# Altium PCB AD_605_PCB1.PcbDoc
Units mm, origin at the board's own origin, x right, y up, seen from the top; angles counter-clockwise.
Board outline 74 x 38 mm, 2 copper layers (Top Layer, Bottom Layer); 17 components, 13 nets, 47 pads, 0 vias.
Unrouted connection lines stored in the file: 12.
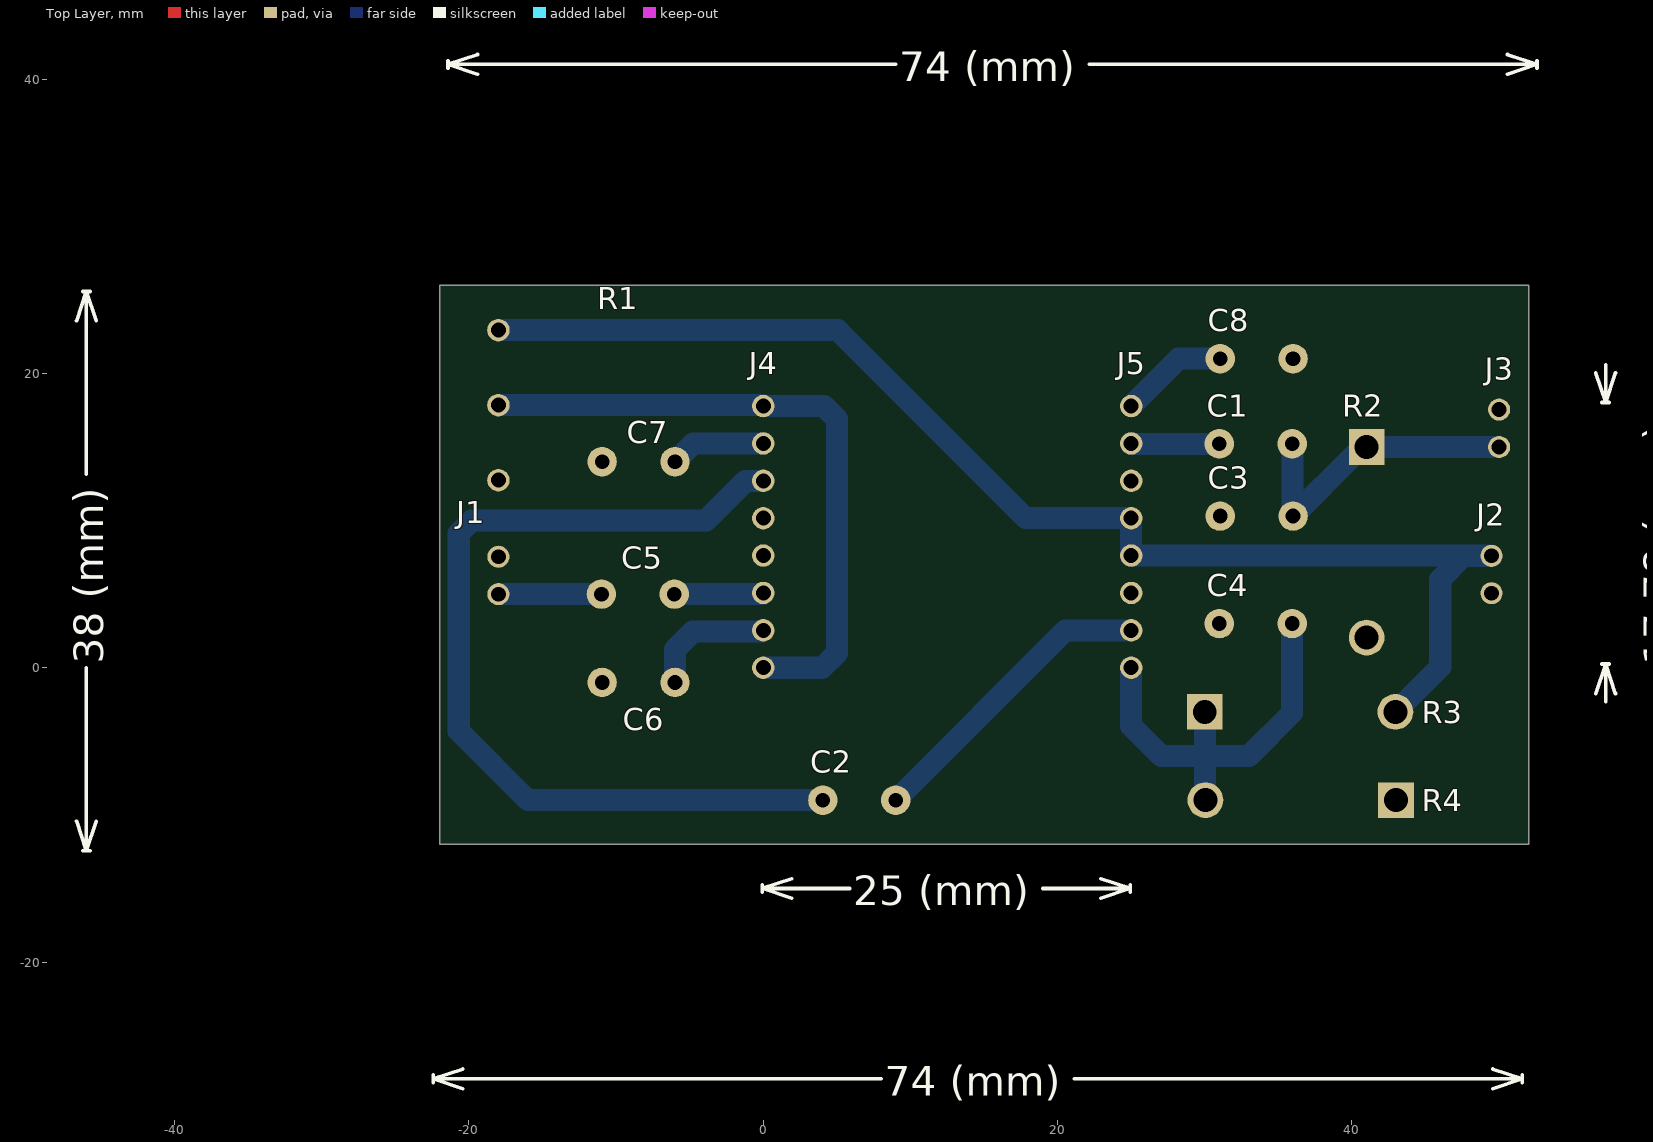
[diagram p0: Top Layer view]
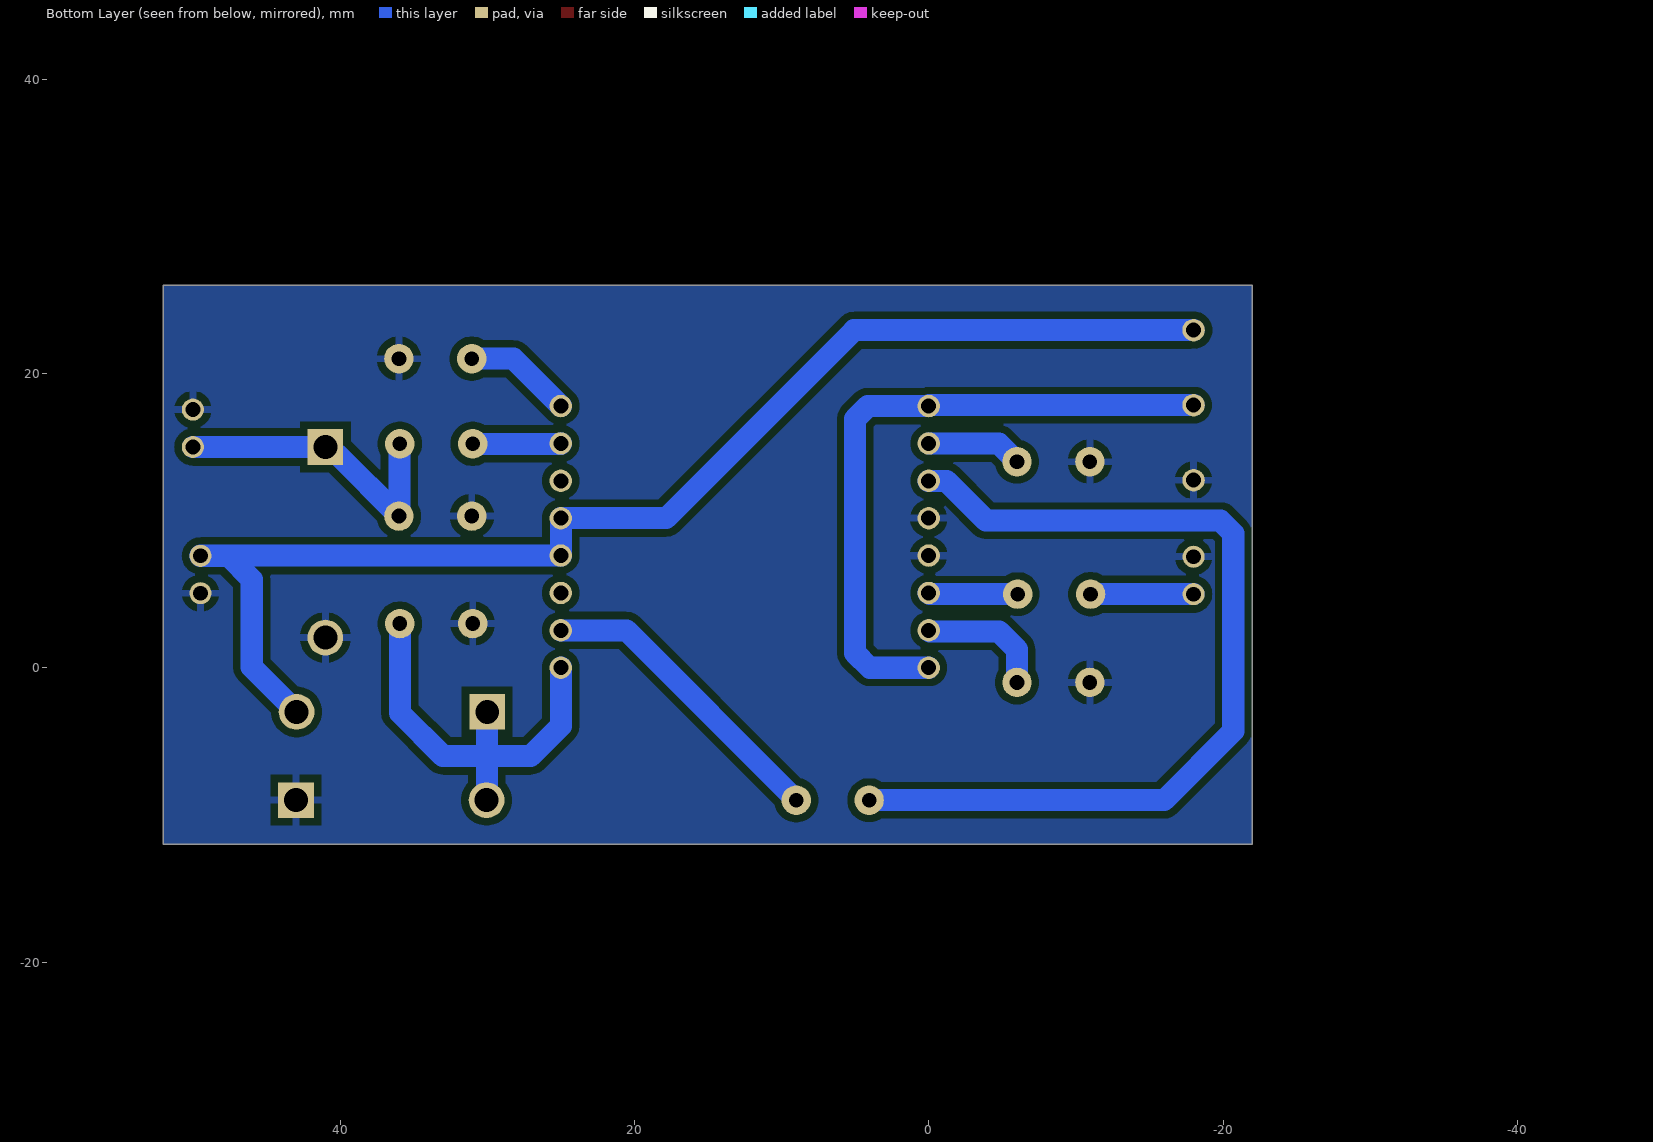
[diagram p1: Bottom Layer view, seen from below]
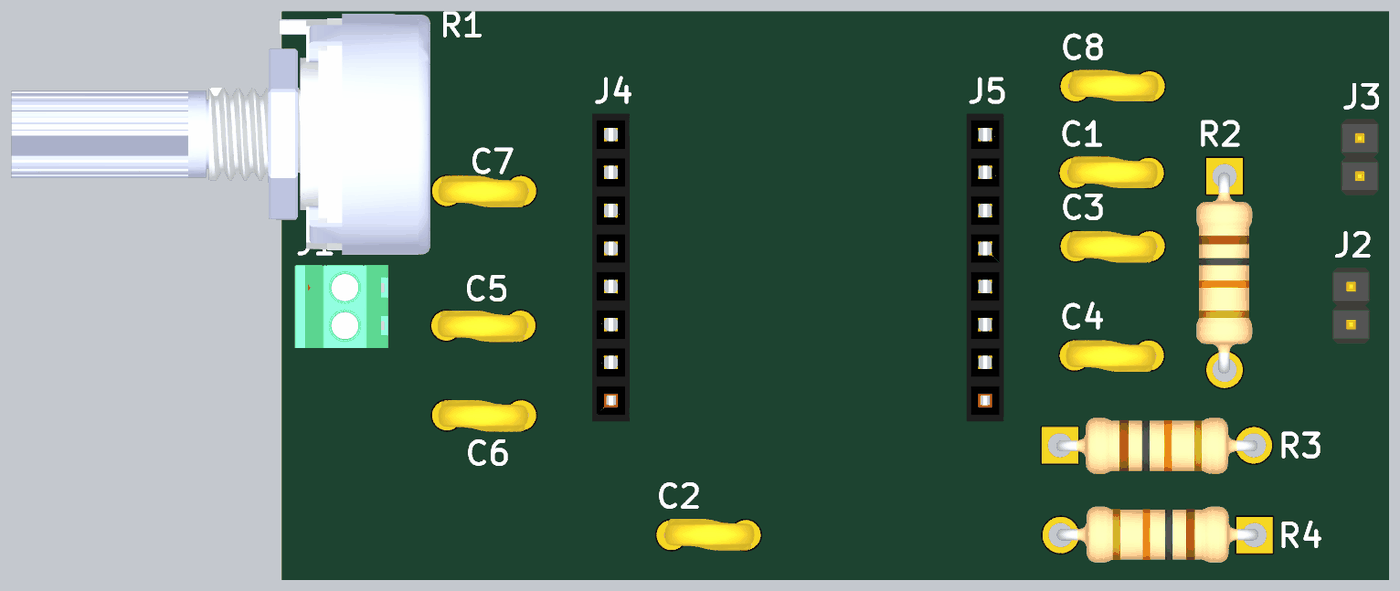
[diagram p2: 3D render of the assembled board from above, using the file's embedded part models]

## Layer stack, top to bottom
Top Solder: solder mask 0.0102, Solder Resist, Dk 3.5
Top Layer: signal copper 0.0356
Dielectric 1: dielectric 0.32, FR-4, Dk 4.8
Bottom Layer: signal copper 0.0356
Bottom Solder: solder mask 0.0102, Solder Resist, Dk 3.5

## Board outline
-22,-12 52,-12 52,26 -22,26

## Design rules (kind name [scope] priority, off if disabled: settings)
Clearance [All] p1: gap=0.5 ignorepadtopadclearanceinfootprint=FALSE
PolygonConnect [All] p1: connectstyle=Relief reliefconductorwidth=0.5 reliefentries=4 polygonreliefangle="90 Angle" airgapwidth=0.5
RoutingVias [All] p1: holewidth=0.711 width=1.27 viastyle="Through Hole" minholewidth=0.711 minwidth=1.27 maxholewidth=0.711 maxwidth=1.27
SolderMaskExpansion [All] p1: expansion=0.102 istentingtop=FALSE
Width [All] p1: maxlimit=3 minlimit=1 preferedwidth=1.5 minimp=50.000000 maximp=50.000000 favimp=50.000000
30 further rules are at their usual default settings.

## Components (designator, comment, footprint, x,y, rotation, side; value= is the part's Value field where it differs from the comment)
C1 "0.1uF" CAP 36.066,15.215 r180 top
C2 "0.1uF" CAP 9.127,-9 r180 top
C3 "0.01uF" CAP 30.92,10.306 r0 top
C4 "0.1uF" CAP 30.859,3 r0 top
C5 "0.1uF" CAP -11.127,5 r0 top
C6 "0.1uF" CAP -11.08,-1 r0 top
C7 "0.1uF" CAP -11.08,14 r0 top
C8 "0.1uF" CAP 36.127,21 r180 top
J1 "Terminal" Terminal -18,7.54 r270 top
J2 "Header 1x2" "Header 1x2" 49.484,5.064 r90 top
J3 "Header 1x2" "Header 1x2" 50,17.54 r270 top
J4 "Header 1x8" "Header 1x8" 0,0 r90 top
J5 "Header 1x8" "Header 1x8" 25,0 r90 top
R1 "Potansiyemetre" Potansiyemetre -18,22.938 r270 top
R2 "100K" "THT Res" 41,2.046 r90 top
R3 "100K" "THT Res" 42.954,-3 r180 top
R4 "100K" "THT Res" 30.046,-9 r0 top

## Footprints (in the part's own frame and the unit in brackets; to place one, negate y for a bottom-side part, rotate by r counter-clockwise, add the part's x,y. Pads: shape width x height; smd on the part's side, far side on the other; paste and mask are expansions set on the pad)
CAP [mm]
  round 2 hole 1: 1(5.08,0) 2(0.127,0)
  body extent -0.46,-1.08 5.54,1.02, height 2.02
"Header 1x2" [mm]
  round 1.5 hole 1: 1(0,0) 2(2.54,0)
  body extent -1.26,-1.24 3.82,1.3, height 9.5
"Header 1x8" [mil]
  round 60 hole 40.16: 1(0,0) 2(100,0) 3(200,0) 4(300,0) 5(400,0) 6(500,0) 7(600,0) 8(700,0)
  body extent -55,-49 755,49, height 335
Potansiyemetre [mil]
  round 60 hole 40.16: 1(0,0) 2(200.64,0) 3(401.44,0)
  body extent -115,-869 519,234, height 827
Terminal [mm]
  round 1.5 hole 1: 1(0,0) 2(2.54,0)
  body extent -1.5,-3.14 4.04,3.14, height 8.5
"THT Res" [mm]
  rect 2.43x2.43 hole 1.62: 1(12.954,0)
  round 2.43 hole 1.62: 2(0,0)
  body extent -0.25,-1.85 13.2,1.91, height 5

## Part data
C1 C2 C3 C4 C5 C6 C7 C8: library part CAP, "Capacitor", ComponentLink1Description="Satın Alma Linki", ComponentLink1URL=https://www.robotistan.com/10nf-seramik-kondansator-paketi-10-adet, ComponentLink2Description="Satın Alma Linki", ComponentLink2URL=https://www.robotistan.com/1nf-seramik-kondansator-paketi-10-adet
J2 J3 J4 J5: "Header", ComponentLink3Description="Satın Alma Linki", ComponentLink3URL=https://www.robotistan.com/1x40-180-12mm
R2 R3 R4: library part "THT RES", "THT RES", ComponentLink1Description="Satın Alma Linki", ComponentLink1URL=https://www.robotistan.com/14w-10k-direnc-paketi-10-adet, ComponentLink2Description="Satın Alma Linki", ComponentLink2URL=https://www.robotistan.com/14w-56k-direnc-paketi-10-adet, ComponentLink3Description="Satın Alma Linki", ComponentLink3URL=https://www.robotistan.com/14w-1k-direnc-paketi-10-adet, ComponentLink4Description="Satın Alma Linki", ComponentLink4URL=https://www.robomarket.com.tr/6-2k-direnc-1-adet-1-4w, ComponentLink5Description="Satın Alma Linki", ComponentLink5URL=https://www.robotistan.com/12w-75k-10-adet, ComponentLink6Description="Satın Alma Linki", ComponentLink6URL=https://www.direnc.net/75k-14w-metalfilm-direnc-paketi-100-adet-1?language=tr&h=cb2d2062, ComponentLink7Description="Satın Alma Linki", ComponentLink7URL=https://www.robotistan.com/14w-4k7-direnc-paketi-10-adet, ComponentLink8Description="Satın Alma Linki", ComponentLink8URL=https://www.robotistan.com/2w-120k, ComponentLink9Description="Satın Alma Linki", ComponentLink9URL=https://www.robotistan.com/14w-3k9-direnc-paketi-10-adet?language=tr&h=0f40f5ee&gclid=CjwKCAjwxOCRBhA8EiwA0X8hi8jDuTXAWIdHih4LhQcB3YXTjEJ8OgB0uW3rlfstCae65K6p5gflnBoC2EgQAvD_BwE, ComponentLink10Description="Satın Alma Linki", ComponentLink10URL=https://www.motorobit.com/urun/3-3m-1-4w-direnc-10-adet
J1 R1: ComponentLink1Description="Satın Alma Linki", ComponentLink2Description=Datasheet

## Nets (pads, with @x,y where several pads share a name; then routed paths per layer and width w, separated by ;. In a path a pad name is that pad's centre, name@x,y a point inside that pad or via, vN(x,y) a via of type N, cw(c..) or ccw(c..) an arc to the next point about the centre after c; other vN are vias at no path point)
+5: J2.2 J5.4 J5.5 R1.1 R3.2 | length 89.7
  Bottom Layer w1.5: R1.1 5.062,22.938 17.84,10.16 J5.5 J5.4 49.468,7.62 J2.2 47.604,7.604 46,6 46,0.046 R3.2
GND: C3.2 C4.2 C6.2 C7.2 C8.2 J1.1 J2.1 J3.1 J4.4 J4.5 R1.3 R2.2 R4.1
NetC1_1: C1.1 J5.7 | length 6
  Bottom Layer w1.5: J5.7 25.006,15.24 25.031,15.215 C1.1
NetC1_2: C1.2 C3.1 J3.2 R2.1 | length 20.9
  Bottom Layer w1.5: C1.2 35.969,15.184 35.969,10.337 C3.1 40.229,14.535 40.535,14.535 R2.1 J3.2
NetC2_1: C2.1 J4.6 | length 62.3
  Bottom Layer w1.5: J4.6 -0.005,12.695 -1.206,12.695 -3.901,10 -19.819,10 -20.697,9.121 -20.697,-4.303 -16,-9 C2.1
NetC2_2: C2.2 J5.2 | length 20.8
  Bottom Layer w1.5: C2.2 20.54,2.54 J5.2
NetC4_1: C4.1 J5.1 R3.1 R4.2 | length 29
  Bottom Layer w1.5: J5.1 25,-3.954 27.046,-6 30.023,-6 ; R3.1 30.023,-3.023 30.023,-6 ; R4.2@30.023,-8.977 30.023,-6 ; C4.1 35.939,-3.061 33,-6 30.023,-6
NetC5_1: C5.1 J4.3 | length 6.1
  Bottom Layer w1.5: C5.1 -0.086,5 -0.006,5.08 J4.3
NetC5_2: C5.2 J1.2 | length 7
  Bottom Layer w1.5: J1.2 C5.2
NetC6_1: C6.1 J4.2 | length 8.8
  Bottom Layer w1.5: C6.1 -6,1.233 -4.77,2.463 -0.083,2.463 -0.011,2.535 J4.2@-0.008,2.532
NetC7_1: C7.1 J4.7 | length 6.5
  Bottom Layer w1.5: C7.1 -4.76,15.24 J4.7@-0.006,15.24
NetC8_1: C8.1 J5.8 | length 7.4
  Bottom Layer w1.5: J5.8@25.005,17.785 28.22,21 C8.1
NetJ4_1: J4.1 J4.8 R1.2 | length 44.7
  Bottom Layer w1.5: R1.2 -0.068,17.842 -0.006,17.78 J4.8 4.121,17.78 5,16.901 5,1 4,0 J4.1
pads on no net: J5.3 J5.6

## Polygon pours and split planes (outlines as drawn)
GND on Bottom Layer "GND_L02_P000" (solid, pour order 0): -22,26 52,26 52,-12 -22,-12

## Silkscreen, mask and mechanical layers (free items; w line width, h text height)
Top Overlay:
  lines w0.254: -46.667,-10.429 -46,-12.429 ; -46.667,23.571 -46,25.571 ; -46.254,-12.429 -45.746,-12.429 ; -46.254,25.571 -45.746,25.571 ; -46,0 -46,-12.429 ; -46,13.142 -46,25.571 ; -45.333,-10.429 -46,-12.429 ; -45.333,23.571 -46,25.571 ; -22.429,-28.192 -22.429,-27.684 ; -21.429,40.746 -21.429,41.254 ; -20.429,-28.605 -22.429,-27.938 ; -20.429,-27.271 -22.429,-27.938 ; -19.429,40.333 -21.429,41 ; -19.429,41.667 -21.429,41 ; -0.071,-15.254 -0.071,-14.746 ; 1.929,-15.667 -0.071,-15 ; 1.929,-14.333 -0.071,-15 ; 5.858,-15 -0.071,-15 ; 8,-27.938 -22.429,-27.938 ; 9,41 -21.429,41 ; 19,-15 24.929,-15 ; 21.142,-27.938 51.571,-27.938 ; 22.142,41 52.571,41 ; 22.929,-15.667 24.929,-15 ; 22.929,-14.333 24.929,-15 ; 24.929,-15.254 24.929,-14.746 ; 49.571,-28.605 51.571,-27.938 ; 49.571,-27.271 51.571,-27.938 ; 50.571,40.333 52.571,41 ; 50.571,41.667 52.571,41 ; 51.571,-28.192 51.571,-27.684 ; 52.571,40.746 52.571,41.254 ; 56.573,-1.755 57.239,0.245 ; 56.573,20.025 57.239,18.025 ; 56.985,0.245 57.493,0.245 ; 56.985,18.025 57.493,18.025 ; 57.239,-2.295 57.239,0.245 ; 57.239,20.565 57.239,18.025 ; 57.906,-1.755 57.239,0.245 ; 57.906,20.025 57.239,18.025
  text "74 (mm)" at 9.254,39.848 h2
  text "38 (mm)" at -44.848,0.254 h2 r90
  text "17.78 (mm)" at 61.848,0.152 h2 r90
  text "25 (mm)" at 6.112,-16.152 h2
  text "74 (mm)" at 8.254,-29.09 h2